# Altium PCB LSS-150-XX-XX-DV-A.PCBDOC
Units mil, origin at the board's own origin, x right, y up, seen from the top; angles counter-clockwise.
Board outline 1624.17 x 403.7 mil, 2 copper layers (Top, Bottom), stack 12.7 mil thick; 1 components, 0 nets, 102 pads, 0 vias.
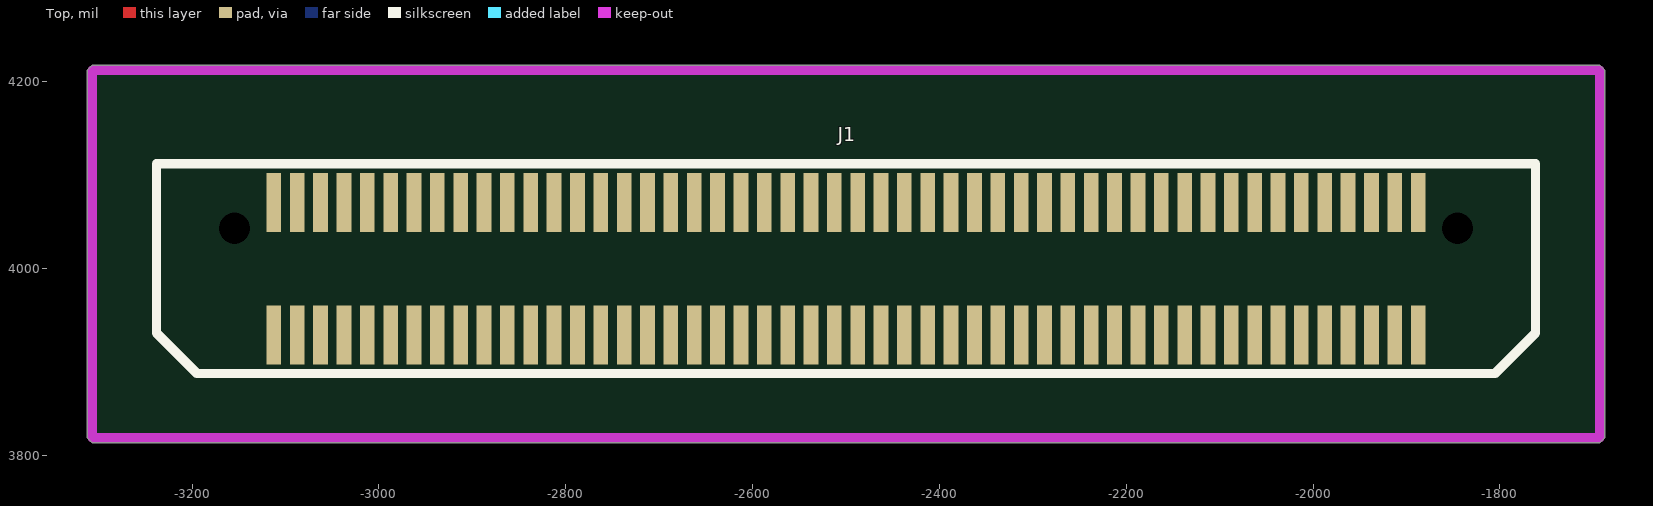
[diagram p0: Top view]
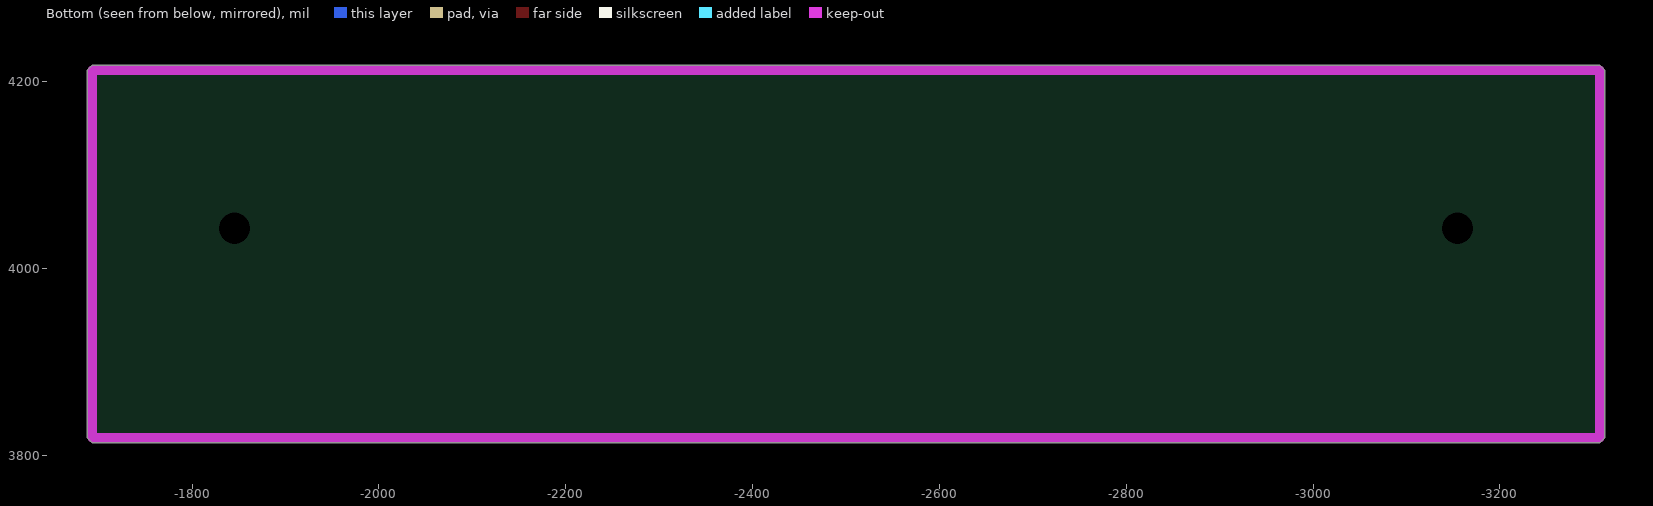
[diagram p1: Bottom view, seen from below]

## Layer stack, top to bottom
Top: signal copper 1.35
Dielectric: dielectric 10, FR-4, Dk 4.3
Bottom: signal copper 1.35

## Board outline
-3312.09,3818.9 -3307.09,3813.9 -1692.91,3813.9 -1687.91,3818.9 -1687.91,4212.6 -1692.91,4217.6 -3307.09,4217.6 -3312.09,4212.6

## Design rules (kind name [scope] priority, off if disabled: settings)
Clearance "'Default' PADS rule_18" [All] p1: gap=6
Clearance "'Default' PADS rule_15" [IsVia vs IsVia] p2: gap=6
ComponentClearance "'Default' PADS rule_12" [All] p1: gap=6 collisioncheckmode=3 verticalgap=10 showdistances=FALSE
FlightTimeFalling "'Default' PADS rule_10" [All] p1: maximum=10,00
FlightTimeRising "'Default' PADS rule_9" [All] p1: maximum=10,00
Length "'Default' PADS rule_5" [All] p1: maxlimit=50000 minlimit=0
MatchedLengths "'Default' PADS rule_11" [InNetClass('All Nets')] p1: tolerance=200 checknetsindiffpair=TRUE checkdiffpairvsdiffpair=TRUE checkothers=TRUE
MaxMinImpedance "'Default' PADS rule_8" [All] p1: minimum=50,00 maximum=150,0
ParallelSegment "'Default' PADS rule_7" [All] p1: limit=1000 gap=200
ParallelSegment "'Default' PADS rule_6" [All] p2: limit=1000 gap=200
PlaneClearance "'Default' PADS rule_14" [All] p1: clearance=6
PlaneConnect "Power Plane Connect Style - pads with no thermal" [(Name='J1-101') Or (Name='J1-102')] p1: planeconnectstyle=NoConnect reliefexpansion=20 reliefentries=4 reliefconductorwidth=10 reliefairgap=10 // PAD - No Thermal Connect Rule
PlaneConnect "Power Plane Connect Style - from global settings" [All] p2: planeconnectstyle=Relief reliefexpansion=20 reliefentries=2 reliefconductorwidth=15 reliefairgap=10
PolygonConnect [All] p1: connectstyle=Relief reliefconductorwidth=10 reliefentries=4 polygonreliefangle="90 Angle"
RoutingLayers "'Default' PADS rule_3" [All] p1: top layer_v5=TRUE bottom layer_v5=TRUE
RoutingPriority "'Default' PADS rule_2" [All] p1: routingpriority=3
RoutingTopology "'Default' PADS rule" [All] p1: topology=Shortest
RoutingVias "'Default' PADS rule_4" [All] p1: holewidth=37 width=55 viastyle="Through Hole" minholewidth=37 minwidth=55 maxholewidth=37 maxwidth=55
SMDToCorner "'Default' PADS rule_16" [All] p1: distance=60000
SMDToPlane "'Default' PADS rule_17" [All] p1: distance=60000
SilkscreenOverComponentPads [All] p1: minsilkscreentomaskgap=10
SolderMaskExpansion [All] p1: expansion=4
TestPointUsage [All] p1: valid=0 allowmultiple=FALSE
Testpoint [All] p1: side=15 testpointundercomponent=TRUE minsize=40 maxsize=100 preferedsize=60 minholesize=0 maxholesize=40 preferedholesize=32 testpointgrid=1 style=1023 order=0-112345678
Width "'Default' PADS rule_13" [All] p1: maxlimit=12 minlimit=12 preferedwidth=12
17 further rules are at their usual default settings.

## Components (designator, comment, footprint, x,y, rotation, side; value= is the part's Value field where it differs from the comment)
J1 "LSS-150-XX-XX-DV-A" LSS-150-XX-XX-DV-A -2500,4000 r0 top

## Footprints (in the part's own frame and the unit in brackets; to place one, negate y for a bottom-side part, rotate by r counter-clockwise, add the part's x,y. Pads: shape width x height; smd on the part's side, far side on the other; paste and mask are expansions set on the pad)
LSS-150-XX-XX-DV-A [mm]
  rect 0.4x1.6 smd mask+0.05: 1(15.557,-1.8) 2(15.557,1.8) 3(14.922,-1.8) 4(14.922,1.8) 5(14.287,-1.8) 6(14.287,1.8) 7(13.652,-1.8) 8(13.652,1.8) 9(13.018,-1.8) 10(13.018,1.8) 11(12.383,-1.8) 12(12.383,1.8) 13(11.747,-1.8) 14(11.747,1.8) 15(11.112,-1.8) 16(11.112,1.8) 17(10.477,-1.8) 18(10.477,1.8) 19(9.842,-1.8) 20(9.842,1.8) 21(9.207,-1.8) 22(9.207,1.8) 23(8.572,-1.8) 24(8.572,1.8) 25(7.938,-1.8) 26(7.938,1.8) 27(7.302,-1.8) 28(7.302,1.8) 29(6.667,-1.8) 30(6.667,1.8) 31(6.032,-1.8) 32(6.032,1.8) 33(5.397,-1.8) 34(5.397,1.8) 35(4.763,-1.8) 36(4.763,1.8) 37(4.127,-1.8) 38(4.127,1.8) 39(3.492,-1.8) 40(3.492,1.8) 41(2.857,-1.8) 42(2.857,1.8) 43(2.222,-1.8) 44(2.222,1.8) 45(1.587,-1.8) 46(1.587,1.8) 47(0.953,-1.8) 48(0.953,1.8) 49(0.318,-1.8) 50(0.318,1.8) 51(-0.318,-1.8) 52(-0.318,1.8) 53(-0.953,-1.8) 54(-0.953,1.8) 55(-1.587,-1.8) 56(-1.587,1.8) 57(-2.222,-1.8) 58(-2.222,1.8) 59(-2.857,-1.8) 60(-2.857,1.8) 61(-3.492,-1.8) 62(-3.492,1.8) 63(-4.127,-1.8) 64(-4.127,1.8) 65(-4.763,-1.8) 66(-4.763,1.8) 67(-5.397,-1.8) 68(-5.397,1.8) 69(-6.032,-1.8) 70(-6.032,1.8) 71(-6.667,-1.8) 72(-6.667,1.8) 73(-7.302,-1.8) 74(-7.302,1.8) 75(-7.938,-1.8) 76(-7.938,1.8) 77(-8.572,-1.8) 78(-8.572,1.8) 79(-9.207,-1.8) 80(-9.207,1.8) 81(-9.842,-1.8) 82(-9.842,1.8) 83(-10.477,-1.8) 84(-10.477,1.8) 85(-11.112,-1.8) 86(-11.112,1.8) 87(-11.747,-1.8) 88(-11.747,1.8) 89(-12.383,-1.8) 90(-12.383,1.8) 91(-13.018,-1.8) 92(-13.018,1.8) 93(-13.652,-1.8) 94(-13.652,1.8) 95(-14.287,-1.8) 96(-14.287,1.8) 97(-14.922,-1.8) 98(-14.922,1.8) 99(-15.557,-1.8) 100(-15.557,1.8)
  round 0.2 hole 0.85 unplated mask+0.575: 101(16.625,1.1) 102(-16.625,1.1)
  silkscreen extent -18.75,-2.85 18.75,2.85

## Nets (pads, with @x,y where several pads share a name; then routed paths per layer and width w, separated by ;. In a path a pad name is that pad's centre, name@x,y a point inside that pad or via, vN(x,y) a via of type N, cw(c..) or ccw(c..) an arc to the next point about the centre after c; other vN are vias at no path point)
pads on no net: J1.1 J1.2 J1.3 J1.4 J1.5 J1.6 J1.7 J1.8 J1.9 J1.10 J1.11 J1.12 J1.13 J1.14 J1.15 J1.16 J1.17 J1.18 J1.19 J1.20 J1.21 J1.22 J1.23 J1.24 J1.25 J1.26 J1.27 J1.28 J1.29 J1.30 J1.31 J1.32 J1.33 J1.34 J1.35 J1.36 J1.37 J1.38 J1.39 J1.40 J1.41 J1.42 J1.43 J1.44 J1.45 J1.46 J1.47 J1.48 J1.49 J1.50 J1.51 J1.52 J1.53 J1.54 J1.55 J1.56 J1.57 J1.58 J1.59 J1.60 J1.61 J1.62 J1.63 J1.64 J1.65 J1.66 J1.67 J1.68 J1.69 J1.70 J1.71 J1.72 J1.73 J1.74 J1.75 J1.76 J1.77 J1.78 J1.79 J1.80 J1.81 J1.82 J1.83 J1.84 J1.85 J1.86 J1.87 J1.88 J1.89 J1.90 J1.91 J1.92 J1.93 J1.94 J1.95 J1.96 J1.97 J1.98 J1.99 J1.100 J1.101 J1.102

## Keep-outs
Keep-Out Layer:
  lines w10: -3307.09,3818.9 -1692.91,3818.9 -1692.91,4212.6 -3307.09,4212.6 -3307.09,3818.9